# Altium PCB Ampli.PcbDoc
Units mm, origin at the board's own origin, x right, y up, seen from the top; angles counter-clockwise.
Board outline 30 x 60 mm, 2 copper layers (Top Layer, Bottom Layer); 31 components, 16 nets, 66 pads, 6 vias.
Unrouted connection lines stored in the file: 5.
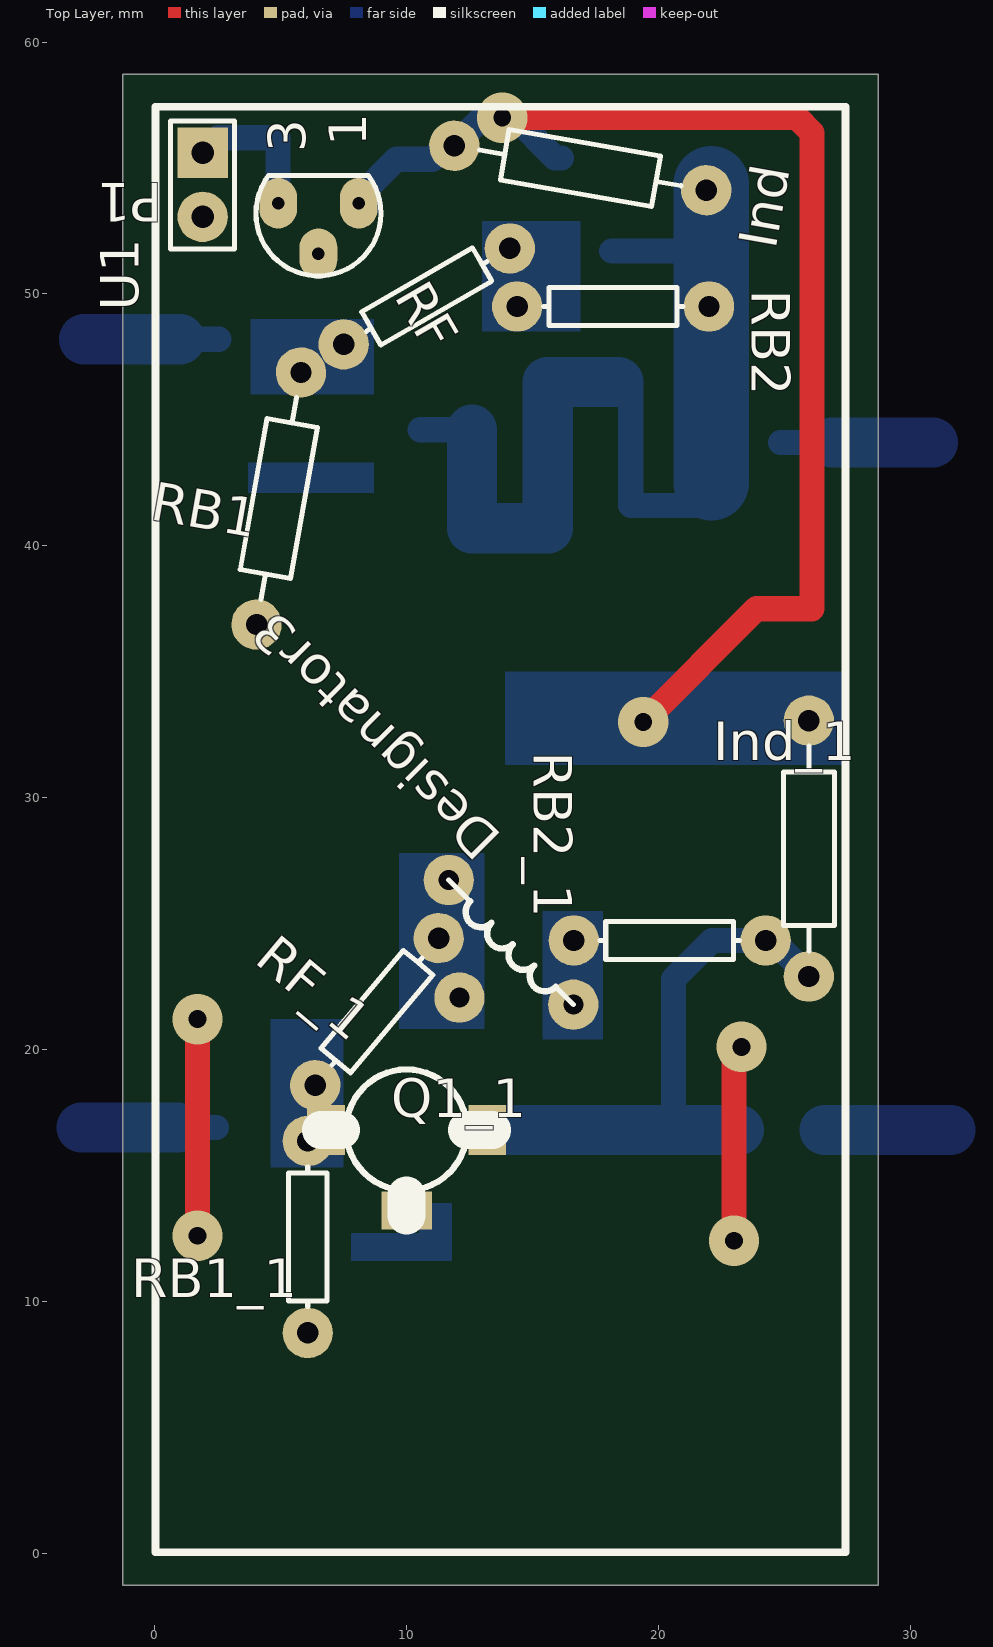
[diagram p0: Top Layer view]
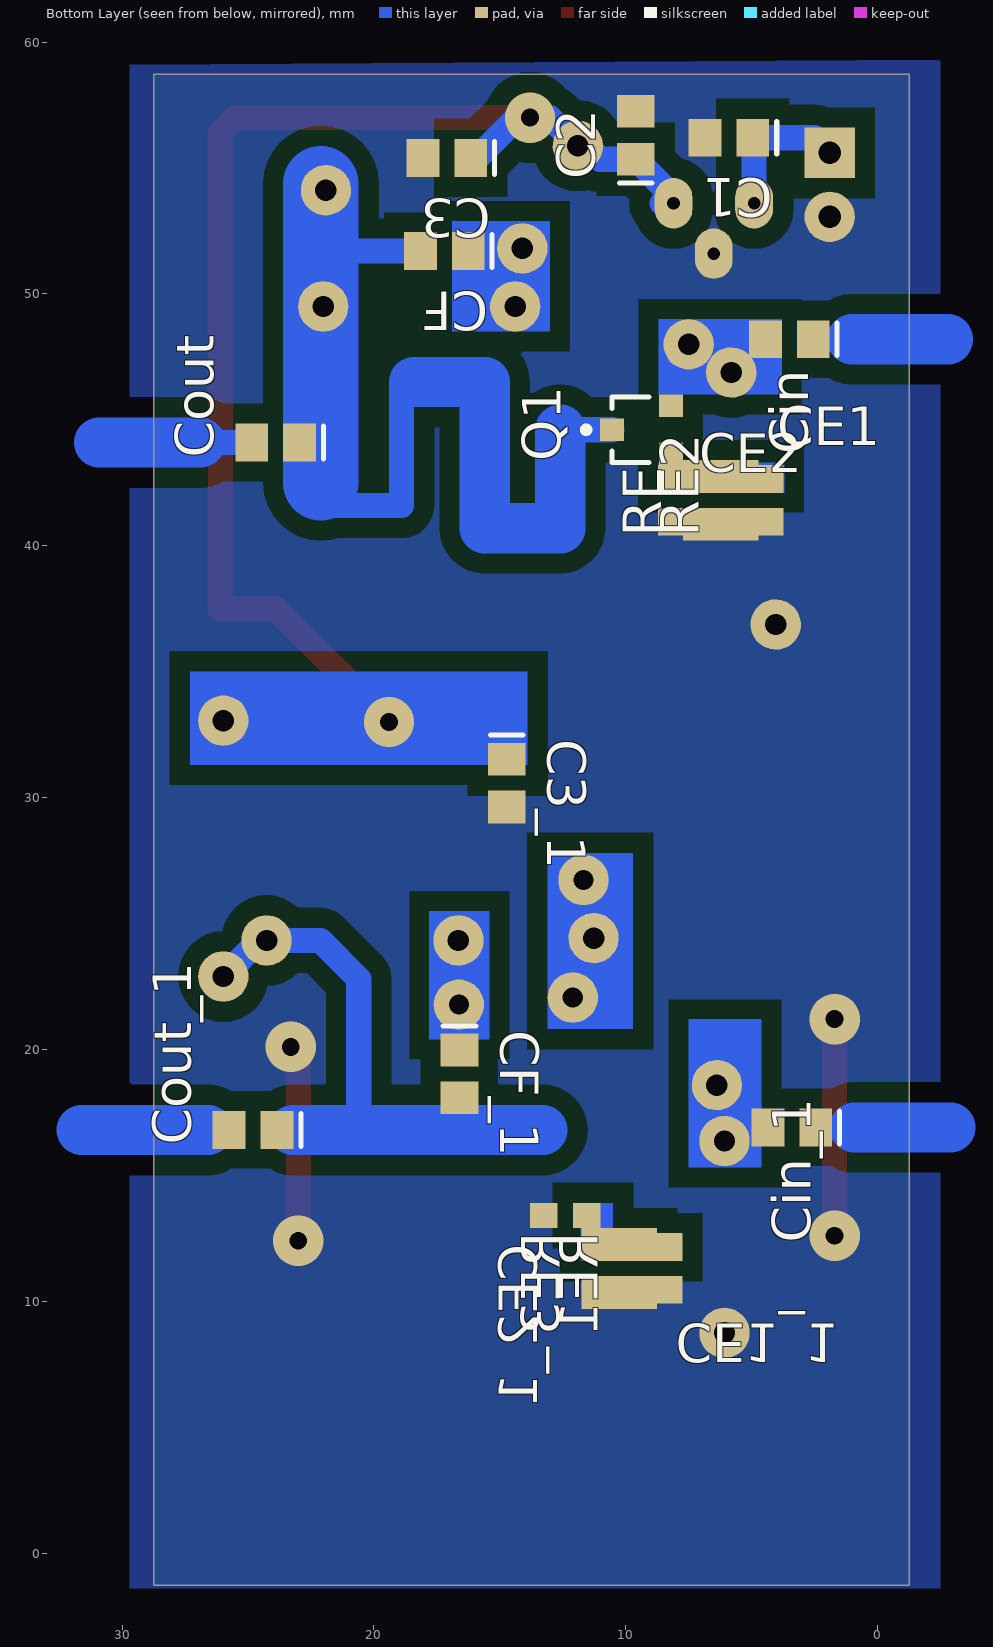
[diagram p1: Bottom Layer view, seen from below]

## Layer stack, top to bottom
Top Layer: signal copper 0.0356
Dielectric: dielectric 0.32, FR-4, Dk 4.8
Bottom Layer: signal copper 0.0356

## Board outline
-1.27,-1.27 28.73,-1.27 28.73,58.73 -1.27,58.73

## Design rules (kind name [scope] priority, off if disabled: settings)
Clearance [All] p1: gap=0.8
ComponentClearance [All] p1: gap=0.254 collisioncheckmode=3 verticalgap=0.254
PolygonConnect [All] p1: connectstyle=Direct reliefconductorwidth=0.254 reliefentries=4 polygonreliefangle="90 Angle"
RoomDefinition Ampli_ancha_1 [InComponentClass('Ampli_ancha')] p1: confinementstyle=ConfineIn formatcopy=TRUE lockcomponents=TRUE outline -4.9,5.8 33.5,5.8 33.5,35 -4.9,35
RoomDefinition Ampli_ancha [InComponentClass('Ampli_ancha')] p2: confinementstyle=ConfineIn formatcopy=TRUE lockcomponents=TRUE outline -2.3,35.2 29.2,35.2 29.2,58.9 -2.3,58.9
RoutingVias [All] p1: holewidth=0.8 width=2 viastyle="Through Hole" minholewidth=0.711 minwidth=1 maxholewidth=0.711 maxwidth=2
SolderMaskExpansion [All] p1: expansion=0.102
TestPointUsage [All] p1: valid=0 allowmultiple=FALSE
Testpoint [All] p1: side=15 testpointundercomponent=TRUE minsize=1.016 maxsize=2.54 preferedsize=1.524 minholesize=0 maxholesize=1.016 preferedholesize=0.813 testpointgrid=0.025 style=1023 order=0123456789
Width [All] p1: maxlimit=5 minlimit=0.3 preferedwidth=2
18 further rules are at their usual default settings.

## Classes and differential pairs
component class Ampli_ancha: C1 C2 C3 CE1 CE2 CF Cin Cout Ind Jin P1 Pout Q1 RB1 RB2 RE RF U1

## Components (designator, comment, footprint, x,y, rotation, side; value= is the part's Value field where it differs from the comment)
C1 "Cap Pol3" C0805 5.9,56.2 r0 bottom
C2 "Cap Pol3" C0805 9.6,56.3 r90 bottom
C3 "Cap Pol3" C0805 17.1,55.4 r0 bottom
C3_1 "Cap Pol3" C0805 14.725,30.575 r270 bottom (schematic designator C3)
CE1 "Cap Semi" 1608[0603] 4.225,41.8 r90 bottom
CE1_1 "Cap Semi" 1608[0603] 8.25,11.3 r270 bottom (schematic designator CE1)
CE2 "Cap Semi" 1608[0603] 8.225,41.8 r90 bottom
CE2_1 "Cap Semi" 1608[0603] 12.4,13.4 r0 bottom (schematic designator CE2)
CF "Cap Pol3" C0805 17.2,51.7 r0 bottom
CF_1 "Cap Pol3" C0805 16.6,19.025 r270 bottom (schematic designator CF)
Cin "Cap Pol3" C0805 3.5,48.2 r0 bottom
Cin_1 "Cap Pol3" C0805 3.4,16.9 r0 bottom (schematic designator Cin)
Cout "Cap Pol3" C0805 23.9,44.1 r0 bottom
Cout_1 "Cap Pol3" C0805 24.8,16.8 r0 bottom (schematic designator Cout)
Designator3 "Comment" "Ind 7mm" 16.625,21.775 r135 top
Ind "Res2" AXIAL-0.4 16.9,55 r170 top
Ind_1 "Res2" AXIAL-0.4 25.975,27.975 r90 top (schematic designator Ind)
P1 "Alimentacion" HDR1X2 1.9,55.6 r270 top
Q1 "BFR92A" SOT23 9.368,44.604 r90 bottom
Q1_1 "BFR92A" SOT-37_SHORT 10,16.8 r0 top (schematic designator Q1)
RB1 "Res1" AXIAL-0.4 4.925,41.875 r80 top
RB1_1 "Res1" AXIAL-0.3 6.075,12.55 r90 top (schematic designator RB1)
RB2 "Res1" AXIAL-0.3 18.2,49.5 r0 top
RB2_1 "Res1" AXIAL-0.3 20.45,24.325 r0 top (schematic designator RB2)
RE "Res Semi" 2012[0805] 6.975,41.8 r90 bottom
RE1 "Res Semi" 2012[0805] 9.5,11.3 r270 bottom (schematic designator RE)
RE2 "Res Semi" 2012[0805] 5.475,41.8 r90 bottom (schematic designator RE)
RE3 "Res Semi" 2012[0805] 11,11.3 r270 bottom (schematic designator RE)
RF "Res1" AXIAL-0.3 10.8,49.9 r30 top
RF_1 "Res1" AXIAL-0.3 8.825,21.5 r50 top (schematic designator RF)
U1 "MC78L05CP" TO92 6.5,53.2 r90 top

## Footprints (in the part's own frame and the unit in brackets; to place one, negate y for a bottom-side part, rotate by r counter-clockwise, add the part's x,y. Pads: shape width x height; smd on the part's side, far side on the other; paste and mask are expansions set on the pad)
1608[0603] [mm] "Chip Capacitor; Body 1.6 x 0.8 mm (LxW typ)"
  rect 1.1x1 smd: 1(-0.85,0) 2(0.85,0)
2012[0805] [mm] "Chip Resistor; Body 2.0 x 1.3 mm (LxW typ)"
  rect 1.3x1.5 smd: 1(-0.95,0) 2(0.95,0)
AXIAL-0.3 [mm] "Resistor; 2 Leads"
  round 2 hole 0.85: 1(-3.81,0) 2(3.81,0)
  silkscreen extent -2.77,-0.76 2.77,0.76
AXIAL-0.4 [mm] "Resistor; 2 Leads"
  round 2 hole 0.85: 1(-5.08,0) 2(5.08,0)
  silkscreen extent -4.06,-1.02 4.06,1.02
C0805 [mm] "Chip Capacitor; Body 2.0 x 1.2 mm (LxW typ)"
  rect 1.3x1.5 smd: 1(-0.95,0) 2(0.95,0)
  silkscreen extent -1.9,-0.65 -1.9,0.65
HDR1X2 [mm] "Connector; Header; 2 Position"
  rect 2x2 hole 0.9: 1(0,0)
  round 2 hole 0.9: 2(2.54,0)
  silkscreen extent -1.27,-1.27 3.81,1.27
"Ind 7mm" [mm]
  round 2 hole 0.8: 0(7,0) 1(0,0) 2(3.4,3)
  silkscreen extent 0,0 7,0.6
SOT23 [mm] "SOT-23; 3 Leads; Body 3.1 x 2.5 mm, inc. leads (LxW max), Alternate Lead Configuration"
  rect 0.9x0.95 smd: 1(0,1.175) 2(0.95,-1.175) 3(-0.95,-1.175)
  silkscreen extent -1.3,-0.3 1.3,2.33
SOT-37_SHORT [mm] "Recortado"
  rect 1.5x2 smd: 0(-3.2,0) 2(3.2,0)
  rect 2x1.5 smd: 1(0,-3.2)
  silkscreen extent -3.4,-3.4 3.4,2.4
TO92 [mm] "TO, Flat Index; 3 In-Line, Axial Leads; Body Dia. 4.5mm; Leads 0.51 x 0.48 mm (max)"
  oval 2x1.5 hole 0.5: 1(0.4,-1.6) 2(-1.6,0) 3(0.4,1.6)
  silkscreen extent -2.48,-2.48 1.5,2.48

## Part data
C1 C2 C3 C3_1 CF CF_1 Cin Cin_1 Cout Cout_1: "Polarized Capacitor (Surface Mount)"
CE1 CE1_1 CE2 CE2_1: "Capacitor (Semiconductor SIM Model)"
Designator3: library part BFR92AW
Ind Ind_1 RB1 RB1_1 RB2 RB2_1 RF RF_1: "Resistor"
P1: library part "Header 2", "Header, 2-Pin"
Q1 Q1_1: "NPN 5 GHz Wideband Transistor"
RE RE1 RE2 RE3: "Semiconductor Resistor"
U1: "3-Terminal Low-Current Positive Fixed Voltage Regulator"

## Via types
v1: diameter 2, hole 0.711, Top Layer to Bottom Layer, 6 vias

## Nets (pads, with @x,y where several pads share a name; then routed paths per layer and width w, separated by ;. In a path a pad name is that pad's centre, name@x,y a point inside that pad or via, vN(x,y) a via of type N, cw(c..) or ccw(c..) an arc to the next point about the centre after c; other vN are vias at no path point)
5V: C2.1 C3.1 C3_1.1 Ind.2 Ind_1.2 U1.1 | length 50.2
  Top Layer w1: v1@14.3,57 25.5,57 26.1,56.4 26.1,37.5 23.9,37.5 v1(19.4,33)
  Bottom Layer w1: U1.1@8.55,53.6 U1.1 8.1,53.85 C2.1 11.018,55.35 11.55,55.882 Ind.2 13.015,57 14.3,57 15.9,55.4 C3.1
  other v1: 13.8,57
BASE: Cin.2 Q1.2 RB1.2 RF.1
basse: Cin_1.2 Q1_1.0 RB1_1.2 RE1.1 RE3.1 RF_1.1
COLECTOR: CF.2 Cout.1 Ind.1 Q1.1 RB2.2 | length 45.1
  Bottom Layer w1: Q1.1 12.6,44.604 ; CF.2 21.903,51.7 Ind.1 ; 18.4,46.5 18.9,46.5 18.9,41.6 22.1,41.6 22.1,42.5
  Bottom Layer w2: 12.6,44.604 12.6,40.7 15.6,40.7 15.6,46.5 18.4,46.5
  Bottom Layer w3: 22.1,42.5 Ind.1@22.1,54.38
collector: CF_1.2 Cout_1.1 Ind_1.1 Q1_1.2 RB2_1.2 | length 22.3
  Bottom Layer w1: 20.6,16.8 20.6,22.8 22.125,24.325 RB2_1.2 ; RB2_1.2@24.47,24.4 Ind_1.1
  Bottom Layer w2: 13.3,16.8 23.2,16.8
EMISOR: CE1.2 CE2.2 Q1.3 RE2.2 RE.2
emiter: CE1_1.1 CE2_1.1 Q1_1.1
GND: C1.2 C2.2 C3.2 C3_1.2 CE1.1 CE1_1.2 CE2.1 CE2_1.2 P1.2 RB1.1 RB1_1.1 RE1.2 RE2.1 RE3.2 RE.1 U1.2 | length 16
  Top Layer w1: v1@1.7,12.7 v1@1.7,21.1 ; v1@23,12.6 23,19.8 v1(23.3,20.1)
  other v1: 23,12.4 1.7,12.6 1.7,21.2
In2: Cin_1.1 | length 5.4
  Bottom Layer w1: 0.9,16.9 Cin_1.1
  Bottom Layer w2: -2.9,16.9 0.9,16.9
NetC1_1: C1.1 P1.1 U1.3 | length 5.8
  Bottom Layer w1: P1.1 2.5,56.2 4.9,56.2 U1.3
NetCF_1: CF.1 RB2.1 RF.2
NetCin_1: Cin.1 | length 5.3
  Bottom Layer w1: 1,48.2 Cin.1
  Bottom Layer w2: -2.8,48.2 1,48.2
NetCout_2: Cout.2 | length 6.1
  Bottom Layer w1: Cout.2 26.9,44.1
  Bottom Layer w2: 26.9,44.1 30.9,44.1
NewNet1: Designator3.0 Designator3.2 RF_1.2
NewNet2: CF_1.1 Designator3.1 RB2_1.1
out2: Cout_1.2 | length 5
  Bottom Layer w2: 26.6,16.8 31.6,16.8

## Polygon pours and split planes (outlines as drawn)
GND on Bottom Layer (solid, remove dead copper): -2.5,59.3 -2.5,-1.4 29.7,-1.4 29.7,59.1
GND on Top Overlay (solid, remove dead copper): -1.7,58.9 -1.7,36.1 29.1,36.1 29.1,58.9

## Other copper
Bottom Layer:
  rectangle net basse: 4.6,15.3 7.5,21.2
  rectangle net NetCF_1: 13,48.5 16.9,52.9
  rectangle net BASE: 3.8,46 8.7,49
  rectangle net NewNet1: 9.7,20.8 13.1,27.8
  rectangle net EMISOR: 3.7,42.1 8.7,43.3
  rectangle: 7.8,11.6 11.7,12.7
  rectangle: 10.5,11.6 11.8,13.9
  rectangle net 5V: 13.9,31.3 27.3,35
  rectangle net NewNet2: 15.4,20.4 17.8,25.5

## Silkscreen, mask and mechanical layers (free items; w line width, h text height)
Top Overlay:
  lines w0.3: 0.03,0.03 0.03,57.43 27.43,57.43 27.43,0.03 0.03,0.03
Drill Drawing:
  text ".LEGEND" at 33.81,3.81 h1.52
  text "Drill Drawing." at 33.81,1.27 h1.52

## Dimensions
0.03,0.03 to 0.03,57.43 on Mechanical 1
0.03,0.03 to 27.43,0.03 on Mechanical 1

## Text inside footprints (layer, text, board x,y; h text height)
U1: Top Overlay "3" at 5.99,55.63 h1.5 r90; Top Overlay "1" at 8.4,55.86 h1.5 r90